# EAGLE board ICs-1 (EAGLE 6.6.0)
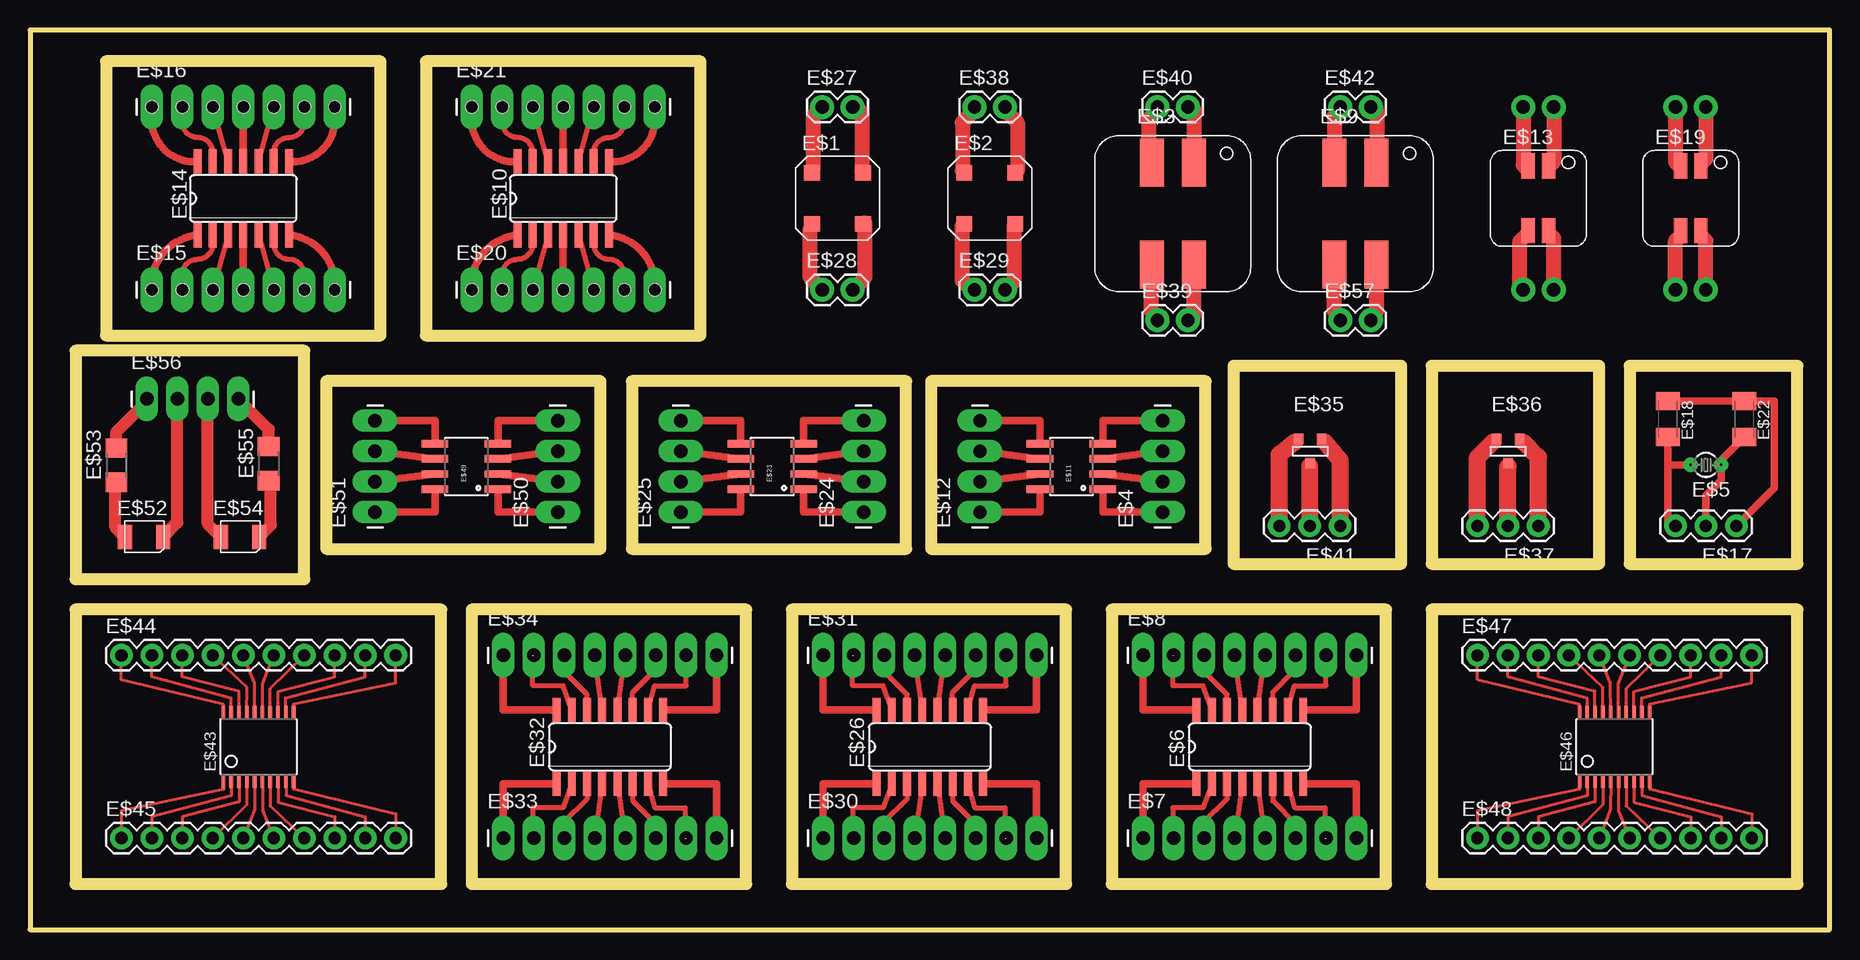
[diagram p0: board, top side]
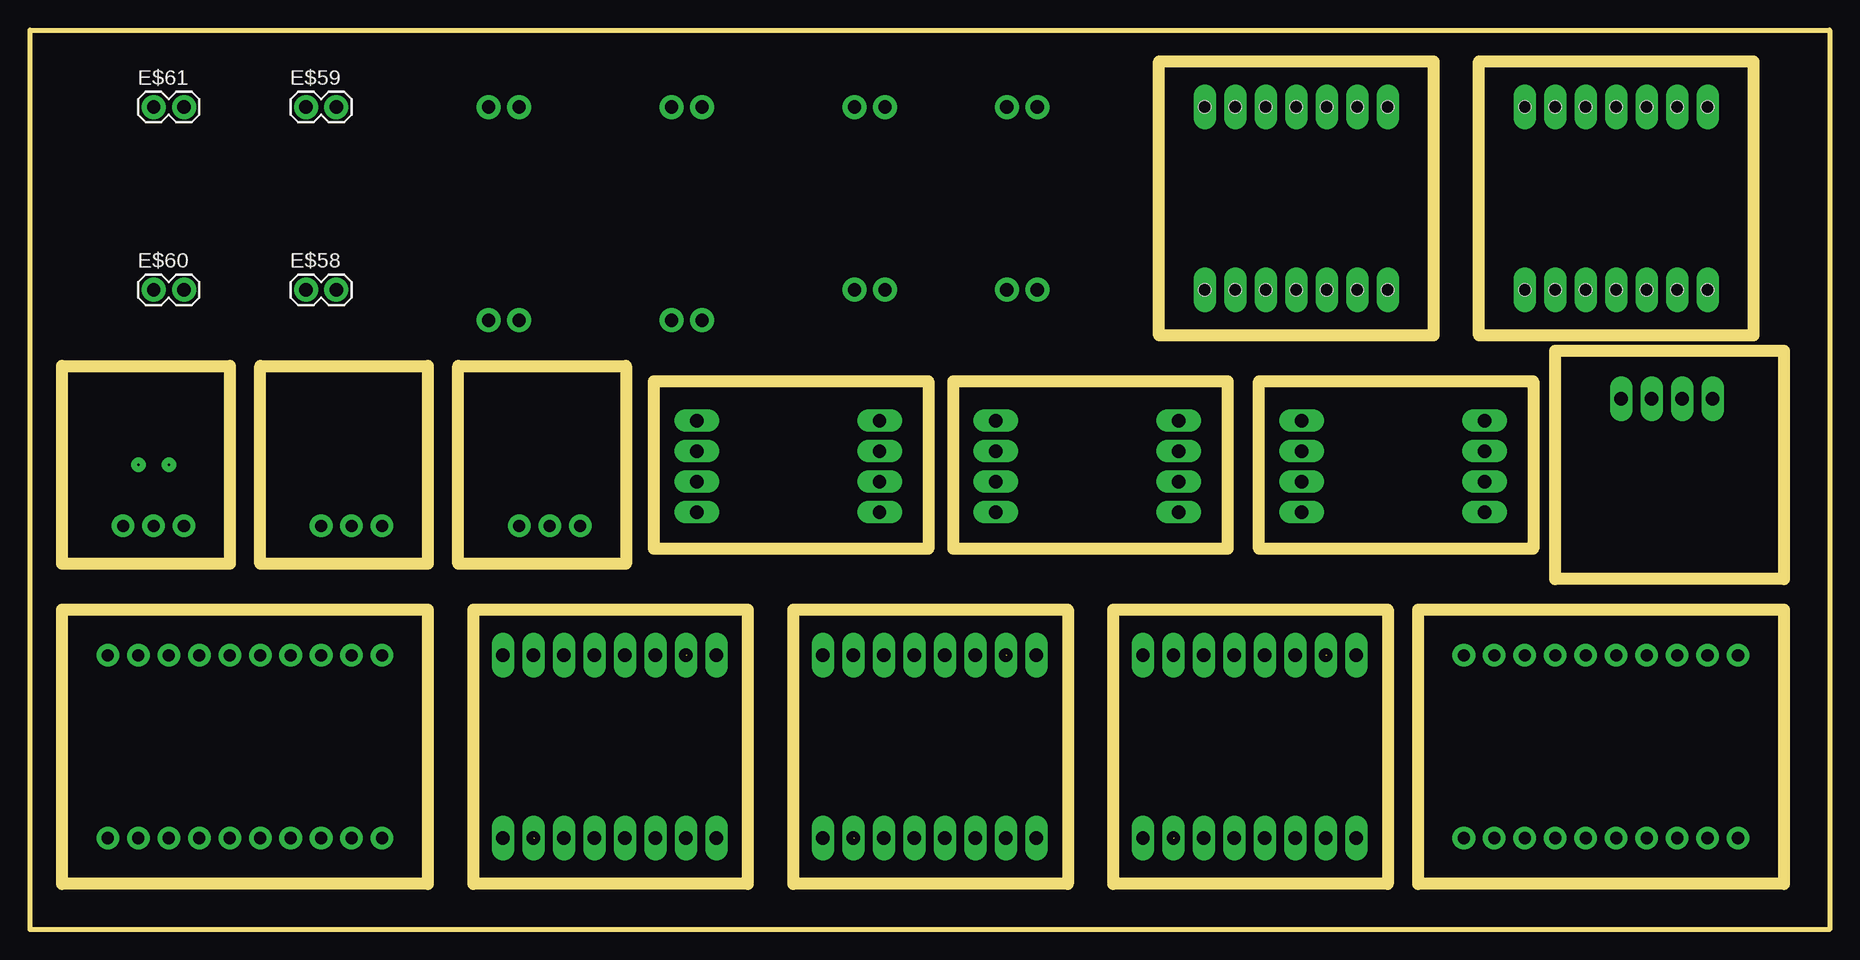
[diagram p1: board, bottom side, seen from below]

Size 150 x 75 mm. Coordinates in mm from the lower left corner, seen from the top.
Outline: 0,0 150,0 150,75 0,75 0,0
Copper layers (1*16): Top 0.035mm / dielectric 1.5mm / Bottom 0.035mm
Design rules "default": minimum track width 10mil, minimum drill 24mil, track to track 8mil, track to pad 8mil, pad to pad 8mil, via to via 8mil, smd to smd 8mil, copper to edge 40mil, drill to drill 8mil, minimum pad ring 10mil, minimum via ring 8mil, stop-mask expansion 4mil, vias tented up to drill 0mil, thermal gap 10mil
Net classes: 0 default: clearance 0.355 mm
Milling: 56 lines

## Footprints (pad centres in the part's own frame; a part is rotated, then mirrored left to right if it is on the bottom)
LPR6235 = smd 1.3 x 1.3: P$1 -2.125,2.125; P$2 -2.125,-2.125; P$3 2.125,-2.125; P$4 2.125,2.125
MSD1260 = smd 2 x 4: P$1 1.75,4.25; P$2 -1.75,4.25; P$3 -1.75,-4.25; P$4 1.75,-4.25
1X04_LONGPADS = drill 1.118 pad 1.88 long: 1 0,0; 2 2.54,0; 3 5.08,0; 4 7.62,0
TC26V = drill 0.2 pad 1.2: 1 -1.27,0; 2 1.27,0
SO16 = smd 0.66 x 2.032: 1 -4.445,-3.073; 2 -3.175,-3.073; 3 -1.905,-3.073; 4 -0.635,-3.073; 5 0.635,-3.073; 6 1.905,-3.073; 7 3.175,-3.073; 8 4.445,-3.073; 9 4.445,3.073; 10 3.175,3.073; 11 1.905,3.073; 12 0.635,3.073; 13 -0.635,3.073; 14 -1.905,3.073; 15 -3.175,3.073; 16 -4.445,3.073
1X08_LONGPADS = drill 1.118 pad 1.88 long: 1 0,0; 2 2.54,0; 3 5.08,0; 4 7.62,0; 5 10.16,0; 6 12.7,0; 7 15.24,0; 8 17.78,0
SO14 = smd 0.66 x 2.032: 1 -3.81,-3.073; 2 -2.54,-3.073; 3 -1.27,-3.073; 4 0,-3.073; 5 1.27,-3.073; 6 2.54,-3.073; 7 3.81,-3.073; 8 3.81,3.073; 9 2.54,3.073; 10 1.27,3.073; 11 0,3.073; 12 -1.27,3.073; 13 -2.54,3.073; 14 -3.81,3.073
SO08 = smd 0.61 x 2.21: 1 -1.905,-2.616; 2 -0.635,-2.616; 3 0.635,-2.616; 4 1.905,-2.616; 5 1.905,2.616; 6 0.635,2.616; 7 -0.635,2.616; 8 -1.905,2.616
MSD7342 = smd 1.1 x 2.1: P$1 0.85,2.7; P$2 -0.85,2.7; P$3 -0.85,-2.7; P$4 0.85,-2.7
1X07_LONGPADS = drill 1.016 pad 1.88 long: 1 0,0; 2 2.54,0; 3 5.08,0; 4 7.62,0; 5 10.16,0; 6 12.7,0; 7 15.24,0 | hole 1.016: 0,0; 2.54,0; 5.08,0; 7.62,0; 10.16,0; 12.7,0; 15.24,0
1X03 = drill 1.016 pad 1.88: 1 0,0; 2 2.54,0; 3 5.08,0
C1206K = smd 1.5 x 2: 1 -1.5,0; 2 1.5,0
1X02 = drill 1.1 pad 2: 1 0,0; 2 2.54,0
SOT-23 = smd 0.787 x 0.889: 1 0.991,1.016; 2 -0.94,1.016; 3 0.025,-1.016
TSSOP20 = smd 0.305 x 0.991: 1 -2.925,-2.918; 2 -2.275,-2.918; 3 -1.625,-2.918; 4 -0.975,-2.918; 5 -0.325,-2.918; 6 0.325,-2.918; 7 0.975,-2.918; 8 1.625,-2.918; 9 2.275,-2.918; 10 2.925,-2.918; 11 2.925,2.918; 12 2.275,2.918; 13 1.625,2.918; 14 0.975,2.918; 15 0.325,2.918; 16 -0.325,2.918; 17 -0.975,2.918; 18 -1.625,2.918; 19 -2.275,2.918; 20 -2.925,2.918
1X10 = drill 1.016 pad 1.88: 1 0,0; 2 2.54,0; 3 5.08,0; 4 7.62,0; 5 10.16,0; 6 12.7,0; 7 15.24,0; 8 17.78,0; 9 20.32,0; 10 22.86,0
LED1210 = smd 1.2 x 2: A -1.6,0; C 1.6,0
R1206 = smd 1.6 x 1.803: 1 -1.422,0; 2 1.422,0

## Placement (x,y rotation side)
E$1  [LPR6235]  67.31,60.96 0 top
E$2  [LPR6235]  80.01,60.96 0 top
E$3  [MSD1260]  95.25,59.69 0 top
E$4  [1X04_LONGPADS]  94.42,34.8 90 top
E$5  [TC26V]  139.7,38.73 180 top
E$6  [SO16]  101.68,15.24 0 top
E$7  [1X08_LONGPADS]  92.79,7.62 0 top
E$8  [1X08_LONGPADS]  92.79,22.86 0 top
E$9  [MSD1260]  110.49,59.69 0 top
E$10  [SO14]  44.45,60.96 0 top
E$11  [SO08]  86.8,38.61 90 top
E$12  [1X04_LONGPADS]  79.18,34.8 90 top
E$13  [MSD7342]  125.73,60.96 0 top
E$14  [SO14]  17.78,60.96 0 top
E$15  [1X07_LONGPADS]  10.16,53.34 0 top
E$16  [1X07_LONGPADS]  10.16,68.58 0 top
E$17  [1X03]  142.24,33.66 180 top
E$18  [C1206K]  136.53,42.55 270 top
E$19  [MSD7342]  138.43,60.96 0 top
E$20  [1X07_LONGPADS]  36.83,53.34 0 top
E$21  [1X07_LONGPADS]  36.83,68.58 0 top
E$22  [C1206K]  142.88,42.55 270 top
E$23  [SO08]  61.86,38.61 90 top
E$24  [1X04_LONGPADS]  69.48,34.8 90 top
E$25  [1X04_LONGPADS]  54.24,34.8 90 top
E$26  [SO16]  75.01,15.24 0 top
E$27  [1X02]  66.04,68.58 0 top
E$28  [1X02]  66.04,53.34 0 top
E$29  [1X02]  78.74,53.34 0 top
E$30  [1X08_LONGPADS]  66.12,7.62 0 top
E$31  [1X08_LONGPADS]  66.12,22.86 0 top
E$32  [SO16]  48.34,15.24 0 top
E$33  [1X08_LONGPADS]  39.45,7.62 0 top
E$34  [1X08_LONGPADS]  39.45,22.86 0 top
E$35  [SOT-23]  106.68,39.88 0 top
E$36  [SOT-23]  123.19,39.88 0 top
E$37  [1X03]  125.73,33.66 180 top
E$38  [1X02]  78.74,68.58 0 top
E$39  [1X02]  93.98,50.8 0 top
E$40  [1X02]  93.98,68.58 0 top
E$41  [1X03]  109.22,33.66 180 top
E$42  [1X02]  109.22,68.58 0 top
E$43  [TSSOP20]  19.05,15.24 0 top
E$44  [1X10]  7.62,22.86 0 top
E$45  [1X10]  7.62,7.62 0 top
E$46  [TSSOP20]  132.08,15.24 0 top
E$47  [1X10]  120.65,22.86 0 top
E$48  [1X10]  120.65,7.62 0 top
E$49  [SO08]  36.38,38.61 90 top
E$50  [1X04_LONGPADS]  44,34.8 90 top
E$51  [1X04_LONGPADS]  28.76,34.8 90 top
E$52  [LED1210]  9.51,32.75 0 top
E$53  [R1206]  7.2,38.72 90 top
E$54  [LED1210]  17.51,32.75 0 top
E$55  [R1206]  19.9,38.84 90 top
E$56  [1X04_LONGPADS]  9.75,44.24 0 top
E$57  [1X02]  109.22,50.8 0 top
E$58  [1X02]  127,53.34 0 bottom
E$59  [1X02]  127,68.58 0 bottom
E$60  [1X02]  139.7,53.34 0 bottom
E$61  [1X02]  139.7,68.58 0 bottom

## Library data of the parts
E$1-E$3 E$9 E$13 E$18 E$19 E$22 E$53 E$55 = iStivi - RCLD
E$4 E$7 E$8 E$12 E$15-E$17 E$20 E$21 E$24 E$25 E$27-E$31 E$33 E$34 E$37-E$42 E$44 E$45 E$47 E$48 E$50 E$51 E$56-E$61 = iStivi - Header-Connector
E$5 = iStivi - Oscillators
E$6 E$10 E$11 E$14 E$23 E$26 E$32 E$43 E$46 E$49 = iStivi - ICs
E$35 E$36 = iStivi - Transistor-FET-reg
E$52 E$54 = iStivi - LED

## Nets
S$1: E$28.1
S$2: E$28.2
S$3: E$27.1
S$12: E$39.2
S$15: E$14.1 E$15.1
S$16: E$14.2 E$15.2
S$17: E$6.16 E$8.1
S$18: E$6.15 E$8.2
S$19: E$6.14 E$8.3
S$20: E$6.13 E$8.4
S$21: E$6.12 E$8.5
S$22: E$6.11 E$8.6
S$23: E$6.10 E$8.7
S$24: E$6.9 E$8.8
S$25: E$6.1 E$7.1
S$26: E$6.2 E$7.2
S$27: E$6.3 E$7.3
S$28: E$6.4 E$7.4
S$29: E$6.5 E$7.5
S$30: E$6.7 E$7.7
S$31: E$6.6 E$7.6
S$32: E$6.8 E$7.8
S$33: E$17.3 E$18.2
S$34: E$17.2 E$22.2
S$35: E$17.1 E$18.1 E$22.1
S$36: E$14.3 E$15.3
S$37: E$14.4 E$15.4
S$39: E$14.5 E$15.5
S$40: E$14.6 E$15.6
S$45: E$59.2
S$46: E$59.1
S$47: E$61.2
S$48: E$61.1
S$49: E$14.7 E$15.7
S$50: E$14.14 E$16.1
S$51: E$14.13 E$16.2
S$52: E$14.12 E$16.3
S$53: E$14.11 E$16.4
S$54: E$14.10 E$16.5
S$55: E$14.9 E$16.6
S$56: E$14.8 E$16.7
S$57: E$23.8 E$25.1
S$58: E$23.7 E$25.2
S$59: E$23.6 E$25.3
S$60: E$23.5 E$25.4
S$61: E$23.1 E$24.1
S$62: E$23.2 E$24.2
S$63: E$11.8 E$12.1
S$64: E$11.7 E$12.2
S$65: E$11.6 E$12.3
S$66: E$11.5 E$12.4
S$67: E$4.1 E$11.1
S$68: E$4.2 E$11.2
S$69: E$4.3 E$11.3
S$70: E$4.4 E$11.4
S$71: E$60.2
S$72: E$60.1
S$91: E$10.1 E$20.1
S$92: E$10.2 E$20.2
S$93: E$10.3 E$20.3
S$94: E$10.4 E$20.4
S$95: E$10.5 E$20.5
S$96: E$10.6 E$20.6
S$97: E$10.7 E$20.7
S$98: E$10.14 E$21.1
S$99: E$10.13 E$21.2
S$100: E$10.12 E$21.3
S$101: E$10.11 E$21.4
S$102: E$10.10 E$21.5
S$103: E$10.9 E$21.6
S$104: E$10.8 E$21.7
S$105: E$23.3 E$24.3
S$106: E$23.4 E$24.4
S$108: E$26.16 E$31.1
S$109: E$26.15 E$31.2
S$110: E$26.14 E$31.3
S$111: E$26.13 E$31.4
S$123: E$26.12 E$31.5
S$124: E$26.11 E$31.6
S$125: E$26.10 E$31.7
S$126: E$26.9 E$31.8
S$127: E$26.1 E$30.1
S$128: E$26.2 E$30.2
S$129: E$26.3 E$30.3
S$130: E$26.4 E$30.4
S$131: E$26.5 E$30.5
S$132: E$26.7 E$30.7
S$133: E$26.6 E$30.6
S$134: E$26.8 E$30.8
S$135: E$32.16 E$34.1
S$136: E$32.15 E$34.2
S$137: E$32.14 E$34.3
S$138: E$32.13 E$34.4
S$139: E$32.12 E$34.5
S$140: E$32.11 E$34.6
S$141: E$32.10 E$34.7
S$142: E$32.9 E$34.8
S$143: E$32.1 E$33.1
S$144: E$32.2 E$33.2
S$145: E$32.3 E$33.3
S$146: E$32.4 E$33.4
S$147: E$32.5 E$33.5
S$148: E$32.7 E$33.7
S$149: E$32.6 E$33.6
S$150: E$32.8 E$33.8
S$154: E$41.3
S$155: E$37.3
S$157: E$43.20 E$44.1
S$158: E$43.19 E$44.2
S$159: E$43.18 E$44.3
S$160: E$43.17 E$44.4
S$161: E$43.16 E$44.5
S$162: E$43.15 E$44.6
S$163: E$43.14 E$44.7
S$164: E$43.12 E$44.9
S$165: E$43.13 E$44.8
S$166: E$43.11 E$44.10
S$167: E$46.20 E$47.1
S$168: E$46.19 E$47.2
S$169: E$46.18 E$47.3
S$170: E$46.17 E$47.4
S$171: E$46.16 E$47.5
S$172: E$46.15 E$47.6
S$173: E$46.14 E$47.7
S$174: E$46.12 E$47.9
S$175: E$46.13 E$47.8
S$176: E$46.11 E$47.10
S$197: E$49.8 E$51.1
S$198: E$49.7 E$51.2
S$199: E$49.6 E$51.3
S$200: E$49.5 E$51.4
S$201: E$49.1 E$50.1
S$202: E$49.2 E$50.2
S$203: E$49.3 E$50.3
S$204: E$49.4 E$50.4
S$205: E$53.2 E$56.1
S$206: E$52.A E$53.1
S$207: E$52.C E$56.2
S$208: E$54.A E$56.3
S$209: E$54.C E$55.1
S$210: E$55.2 E$56.4

## Tracks (layer width: path | path; a pad name or v marks a point on that pad's centre or on a via)
S$1
  Top 1.27: E$28.1 65.02,54.36 65.02,58.42
S$2
  Top 1.27: E$28.2 69.6,54.36 69.6,58.93
S$3
  Top 1.27: E$27.1 65.28,67.82 65.28,63.5
S$4
  Top 1.27: 68.83,68.58 69.34,68.07 69.34,63.25
S$5
  Top 1.27: 78.99,68.58 77.72,67.31 77.72,63.25
S$6
  Top 1.27: 78.74,53.09 77.72,54.1 77.72,58.67
S$7
  Top 1.27: 81.03,53.09 82.04,54.1 82.04,58.67
S$8
  Top 1.27: 81.03,68.58 82.3,67.31 82.3,63.25
S$9
  Top 1.27: 93.98,68.33 93.22,67.56 93.22,64.01
S$10
  Top 1.27: 96.77,68.58 97.03,68.33 97.03,64.26
S$11
  Top 1.27: 93.98,51.05 93.47,51.56 93.47,54.61
S$12
  Top 1.27: E$39.2 97.03,51.31 97.03,54.36
S$13
  Top 1.27: 109.47,68.58 108.71,67.82 108.71,64.26
S$14
  Top 1.27: 112.01,68.58 112.27,68.33 112.27,64.26
S$15
  Top 0.61: E$14.1 arc90 10.16,53.44 E$15.1
S$16
  Top 0.406: E$14.2 15.24,57.15 arc-90 13.97,55.88 arc90 12.7,54.61 E$15.2
S$17
  Top 0.61: E$8.1 92.79,18.31 E$6.16
S$18  (1 unrouted)
  Top 0.406: E$6.15 97.79,20.32 95.25,20.32 95.25,22.86
S$19
  Top 0.406: E$6.14 99.78,19.61 97.79,21.59 97.79,22.78 E$8.3
S$20
  Top 0.406: E$6.13 E$8.4
S$21
  Top 0.406: E$6.12 E$8.5
S$22
  Top 0.406: E$6.11 103.58,19.77 105.41,21.59 105.41,22.78 E$8.6
S$23
  Top 0.406: E$6.10 105.41,20.32 108.03,20.32 E$8.7
S$24
  Top 0.61: E$8.8 110.57,18.31 E$6.9
S$25
  Top 0.61: E$7.1 92.79,12.17 E$6.1
S$26
  Top 0.406: E$6.2 97.79,10.16 95.25,10.16 95.25,7.62 E$7.2
S$27
  Top 0.406: E$6.3 99.78,10.88 97.79,8.89 97.79,7.7 E$7.3
S$28
  Top 0.406: E$6.4 E$7.4
S$29
  Top 0.406: E$6.5 E$7.5
S$30  (1 unrouted)
  Top 0.406: E$6.7 105.41,10.16 107.95,10.16 107.95,7.62
S$31
  Top 0.406: E$6.6 103.58,10.71 105.49,8.81 E$7.6
S$32
  Top 0.61: E$7.8 110.57,12.17 E$6.8
S$33
  Top 0.406: E$17.3 136.53,33.66
  Top 0.61: 136.53,33.66 136.53,38.73 | 136.53,38.73 E$18.2 | 138.43,38.73 136.53,38.73
S$34
  Top 0.406: 140.97,38.73 140.97,39.14
  Top 0.61: E$17.2 139.7,36.2 140.97,37.47 140.97,38.73 | 140.97,39.14 E$22.2
S$35
  Top 0.61: E$18.1 E$22.1 145.41,44.05 145.41,36.83 E$17.1
S$36
  Top 0.406: E$14.3 E$15.3
S$37
  Top 0.61: E$14.4 E$15.4
S$39
  Top 0.406: E$14.5 E$15.5
S$40
  Top 0.406: E$14.6 20.32,57.15 arc90 21.59,55.88 arc-90 22.86,54.61 E$15.6
S$41
  Top 1.27: 109.47,50.8 108.71,51.56 108.71,54.61
S$42
  Top 1.27: 111.51,50.8 112.27,51.56 112.27,54.36
S$43
  Top 1.27: 124.21,53.34 124.21,57.4 124.71,57.91
S$44
  Top 1.27: 127,53.09 127,57.66 126.75,57.91
S$45
  Top 1.27: E$59.2 124.46,63.75 124.71,63.5
S$46
  Top 1.27: E$59.1 127,64.01 126.75,63.75
S$47
  Top 1.27: E$61.2 137.16,64.01 137.41,63.75
S$48
  Top 1.27: E$61.1 139.7,64.26 139.45,64.01
S$49
  Top 0.61: E$14.7 arc-90 25.4,53.44 E$15.7
S$50
  Top 0.61: E$14.14 arc-90 10.16,67.21 E$16.1
S$51
  Top 0.406: E$14.13 15.24,64.77 arc90 13.97,66.04 arc-90 12.7,67.31 E$16.2
S$52
  Top 0.406: E$14.12 E$16.3
S$53
  Top 0.61: E$16.4 E$14.11
S$54
  Top 0.406: E$14.10 E$16.5
S$55
  Top 0.406: E$14.9 20.32,64.77 arc-90 21.59,66.04 arc90 22.86,67.31 E$16.6
S$56
  Top 0.61: E$14.8 arc90 25.4,67.21 E$16.7
S$57
  Top 0.61: E$25.1 59.25,34.8 E$23.8
S$58
  Top 0.61: E$25.2 E$23.7
S$59
  Top 0.61: E$25.3 E$23.6
S$60
  Top 0.61: E$25.4 59.25,42.42 E$23.5
S$61
  Top 0.61: E$23.1 64.48,34.8 E$24.1
S$62
  Top 0.61: E$23.2 E$24.2
S$63
  Top 0.61: E$12.1 84.19,34.8 E$11.8
S$64
  Top 0.61: E$12.2 E$11.7
S$65
  Top 0.61: E$12.3 E$11.6
S$66
  Top 0.61: E$12.4 84.19,42.42 E$11.5
S$67
  Top 0.61: E$11.1 89.42,34.8 E$4.1
S$68
  Top 0.61: E$11.2 E$4.2
S$69
  Top 0.61: E$11.3 E$4.3
S$70
  Top 0.61: E$11.4 89.42,42.42 E$4.4
S$71
  Top 1.27: E$60.2 137.16,57.4 137.41,57.66
S$72
  Top 1.27: E$60.1 139.7,57.4 139.45,57.66
S$91
  Top 0.61: E$10.1 arc90 36.83,53.44 E$20.1
S$92
  Top 0.406: E$10.2 41.91,57.15 arc-90 40.64,55.88 arc90 39.37,54.61 E$20.2
S$93
  Top 0.406: E$10.3 E$20.3
S$94
  Top 0.61: E$10.4 E$20.4
S$95
  Top 0.406: E$10.5 E$20.5
S$96
  Top 0.406: E$10.6 46.99,57.15 arc90 48.26,55.88 arc-90 49.53,54.61 E$20.6
S$97
  Top 0.61: E$10.7 arc-90 52.07,53.44 E$20.7
S$98
  Top 0.61: E$10.14 arc-90 36.83,67.21 E$21.1
S$99
  Top 0.406: E$10.13 41.91,64.77 arc90 40.64,66.04 arc-90 39.37,67.31 E$21.2
S$100
  Top 0.406: E$10.12 E$21.3
S$101
  Top 0.61: E$21.4 E$10.11
S$102
  Top 0.406: E$10.10 E$21.5
S$103
  Top 0.406: E$10.9 46.99,64.77 arc-90 48.26,66.04 arc90 49.53,67.31 E$21.6
S$104
  Top 0.61: E$10.8 arc90 52.07,67.21 E$21.7
S$105
  Top 0.61: E$23.3 E$24.3
S$106
  Top 0.61: E$23.4 64.48,42.42 E$24.4
S$108
  Top 0.61: E$31.1 66.12,18.31 E$26.16
S$109  (1 unrouted)
  Top 0.406: E$26.15 71.12,20.32 68.58,20.32 68.58,22.86
S$110
  Top 0.406: E$26.14 73.11,19.61 71.12,21.59 71.12,22.78 E$31.3
S$111
  Top 0.406: E$26.13 E$31.4
S$123
  Top 0.406: E$26.12 E$31.5
S$124
  Top 0.406: E$26.11 76.92,19.77 78.74,21.59 78.74,22.78 E$31.6
S$125
  Top 0.406: E$26.10 78.74,20.32 81.36,20.32 E$31.7
S$126
  Top 0.61: E$31.8 83.9,18.31 E$26.9
S$127
  Top 0.61: E$30.1 66.12,12.17 E$26.1
S$128
  Top 0.406: E$26.2 71.12,10.16 68.58,10.16 68.58,7.62 E$30.2
S$129
  Top 0.406: E$26.3 73.11,10.88 71.12,8.89 71.12,7.7 E$30.3
S$130
  Top 0.406: E$26.4 E$30.4
S$131
  Top 0.406: E$26.5 E$30.5
S$132  (1 unrouted)
  Top 0.406: E$26.7 78.74,10.16 81.28,10.16 81.28,7.62
S$133
  Top 0.406: E$26.6 76.92,10.71 78.82,8.81 E$30.6
S$134
  Top 0.61: E$30.8 83.9,12.17 E$26.8
S$135
  Top 0.61: E$34.1 39.45,18.31 E$32.16
S$136  (1 unrouted)
  Top 0.406: E$32.15 44.45,20.32 41.91,20.32 41.91,22.86
S$137
  Top 0.406: E$32.14 46.44,19.61 44.45,21.59 44.45,22.78 E$34.3
S$138
  Top 0.406: E$32.13 E$34.4
S$139
  Top 0.406: E$32.12 E$34.5
S$140
  Top 0.406: E$32.11 50.24,19.77 52.07,21.59 52.07,22.78 E$34.6
S$141
  Top 0.406: E$32.10 52.07,20.32 54.69,20.32 E$34.7
S$142
  Top 0.61: E$34.8 57.23,18.31 E$32.9
S$143
  Top 0.61: E$33.1 39.45,12.17 E$32.1
S$144
  Top 0.406: E$32.2 44.45,10.16 41.91,10.16 41.91,7.62 E$33.2
S$145
  Top 0.406: E$32.3 46.44,10.88 44.45,8.89 44.45,7.7 E$33.3
S$146
  Top 0.406: E$32.4 E$33.4
S$147
  Top 0.406: E$32.5 E$33.5
S$148  (1 unrouted)
  Top 0.406: E$32.7 52.07,10.16 54.61,10.16 54.61,7.62
S$149
  Top 0.406: E$32.6 50.24,10.71 52.15,8.81 E$33.6
S$150
  Top 0.61: E$33.8 57.23,12.17 E$32.8
S$151
  Top 1.422: 104.14,33.53 104.14,39.62 105.41,40.64
S$152
  Top 1.422: 109.22,33.78 109.22,39.12 107.95,40.64
S$153
  Top 1.422: 106.68,33.53 106.68,38.61
S$154
  Top 0.406: E$41.3 103.5,33.66
S$155
  Top 0.406: E$37.3 120.02,33.66
S$156
  Top 1.422: 123.19,33.53 123.19,38.61
S$157
  Top 0.254: E$43.20 16.13,18.77 7.62,20.83 E$44.1
S$158
  Top 0.254: E$43.19 16.76,19.28 10.16,21.08 E$44.2
S$159
  Top 0.254: E$43.18 17.42,19.86 12.7,21.08 E$44.3
S$160
  Top 0.254: E$43.17 18.09,20.17 E$44.4
S$161
  Top 0.254: E$43.16 18.72,20.57 E$44.5
S$162
  Top 0.254: E$43.15 19.38,20.47 E$44.6
S$163
  Top 0.254: E$43.14 20.04,20.09 E$44.7
S$164
  Top 0.254: E$43.12 21.31,19.33 27.94,21.08 E$44.9
S$165
  Top 0.254: E$43.13 20.68,19.84 25.4,21.08 E$44.8
S$166
  Top 0.254: E$43.11 21.97,18.8 30.48,20.57 E$44.10
S$167
  Top 0.254: E$46.20 129.16,18.77 120.65,20.83 E$47.1
S$168
  Top 0.254: E$46.19 129.79,19.28 123.19,21.08 E$47.2
S$169
  Top 0.254: E$46.18 130.45,19.86 125.73,21.08 E$47.3
S$170
  Top 0.254: E$46.17 131.12,20.17 E$47.4
S$171
  Top 0.254: E$46.16 131.75,20.57 E$47.5
S$172
  Top 0.254: E$46.15 132.41,20.47 E$47.6
S$173
  Top 0.254: E$46.14 133.07,20.09 E$47.7
S$174
  Top 0.254: E$46.12 134.34,19.33 140.97,21.08 E$47.9
S$175
  Top 0.254: E$46.13 133.71,19.84 138.43,21.08 E$47.8
S$176
  Top 0.254: E$46.11 135,18.8 143.51,20.57 E$47.10
S$177
  Top 0.254: 21.98,12.32 21.97,11.71 30.48,9.65 30.48,7.62
S$178
  Top 0.254: 21.32,12.32 21.34,11.2 27.94,9.4 27.94,7.62
S$179
  Top 0.254: 20.68,12.32 20.68,10.62 25.4,9.4 25.4,7.62
S$180
  Top 0.254: 20.02,12.32 20.02,10.31 22.86,7.62
S$181
  Top 0.254: 19.38,12.32 19.38,9.91 20.32,7.62
S$182
  Top 0.254: 18.73,12.32 18.72,10.01 17.78,7.62
S$183
  Top 0.254: 18.07,12.32 18.06,10.39 15.24,7.62
S$184
  Top 0.254: 16.77,12.32 16.79,11.15 10.16,9.4 10.16,7.62
S$185
  Top 0.254: 17.43,12.32 17.42,10.64 12.7,9.4 12.7,7.62
S$186
  Top 0.254: 16.12,12.32 16.13,11.68 7.62,9.91 7.62,7.62
S$187
  Top 0.254: 135,12.32 135,11.71 143.51,9.65 143.51,7.62
S$188
  Top 0.254: 134.35,12.32 134.37,11.2 140.97,9.4 140.97,7.62
S$189
  Top 0.254: 133.71,12.32 133.71,10.62 138.43,9.4 138.43,7.62
S$190
  Top 0.254: 133.06,12.32 133.04,10.31 135.89,7.62
S$191
  Top 0.254: 132.41,12.32 132.41,9.91 133.35,7.62
S$192
  Top 0.254: 131.75,12.32 131.75,10.01 130.81,7.62
S$193
  Top 0.254: 131.1,12.32 131.09,10.39 128.27,7.62
S$194
  Top 0.254: 129.81,12.32 129.82,11.15 123.19,9.4 123.19,7.62
S$195
  Top 0.254: 130.46,12.32 130.45,10.64 125.73,9.4 125.73,7.62
S$196
  Top 0.254: 129.16,12.32 129.16,11.68 120.65,9.91 120.65,7.62
S$197
  Top 0.61: E$51.1 33.77,34.8 E$49.8
S$198
  Top 0.61: E$51.2 E$49.7
S$199
  Top 0.61: E$51.3 E$49.6
S$200
  Top 0.61: E$51.4 33.77,42.42 E$49.5
S$201
  Top 0.61: E$49.1 39,34.8 E$50.1
S$202
  Top 0.61: E$49.2 E$50.2
S$203
  Top 0.61: E$49.3 E$50.3
S$204
  Top 0.61: E$49.4 39,42.42 E$50.4
S$205
  Top 1.016: E$53.2 7.2,41.49 9.65,43.94 9.65,44.14 E$56.1
S$206
  Top 1.016: E$52.A 7.11,33.54 7.11,37.34 7.15,37.3 E$53.1
S$207
  Top 1.016: E$52.C 12.29,33.92 E$56.2
S$208
  Top 1.016: E$54.A 14.83,33.83 E$56.3
S$209
  Top 1.016: E$54.C 20.07,33.7 20.07,37.08 19.9,37.25 E$55.1
S$210
  Top 1.016: E$55.2 19.9,41.71 E$56.4
S$211
  Top 1.422: 120.65,33.53 120.65,39.37 121.92,40.64
S$212
  Top 1.422: 125.73,33.53 125.73,39.37 124.46,40.64

## Text on the board
Top: TOP SOLDER
Dimension: Breakout Boards
tStop: SOLDER MASK